# Altium PCB AV.PcbDoc
Units mil, origin at the board's own origin, x right, y up, seen from the top; angles counter-clockwise.
Board outline 1968.5 x 1968.5 mil, 4 copper layers (Top Layer, GND, Power, Bottom Layer), stack 30.634 mil thick; 121 components, 87 nets, 399 pads, 293 vias.
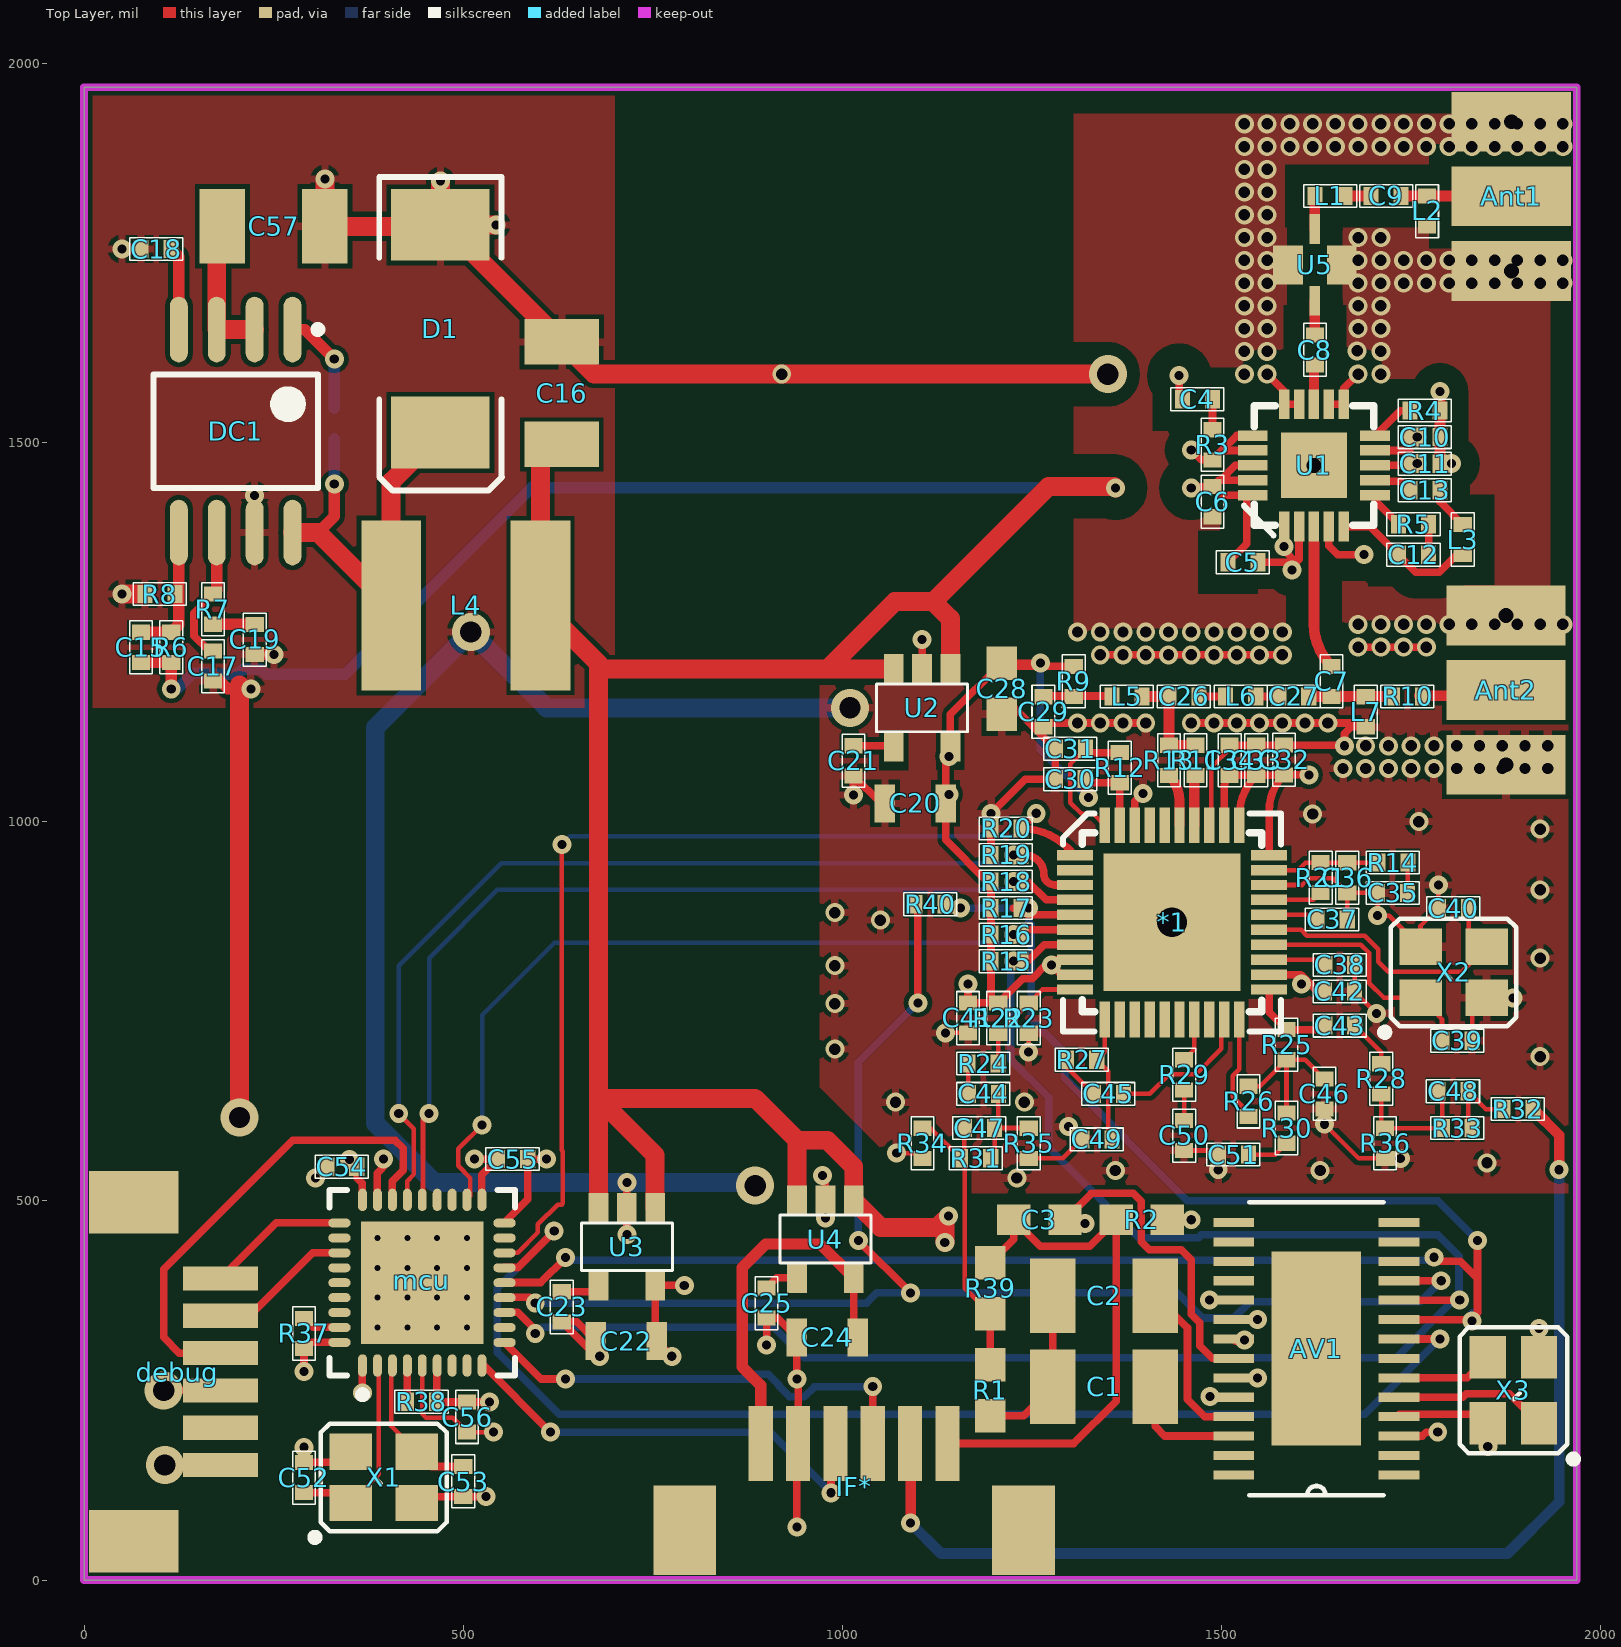
[diagram p0: Top Layer view]
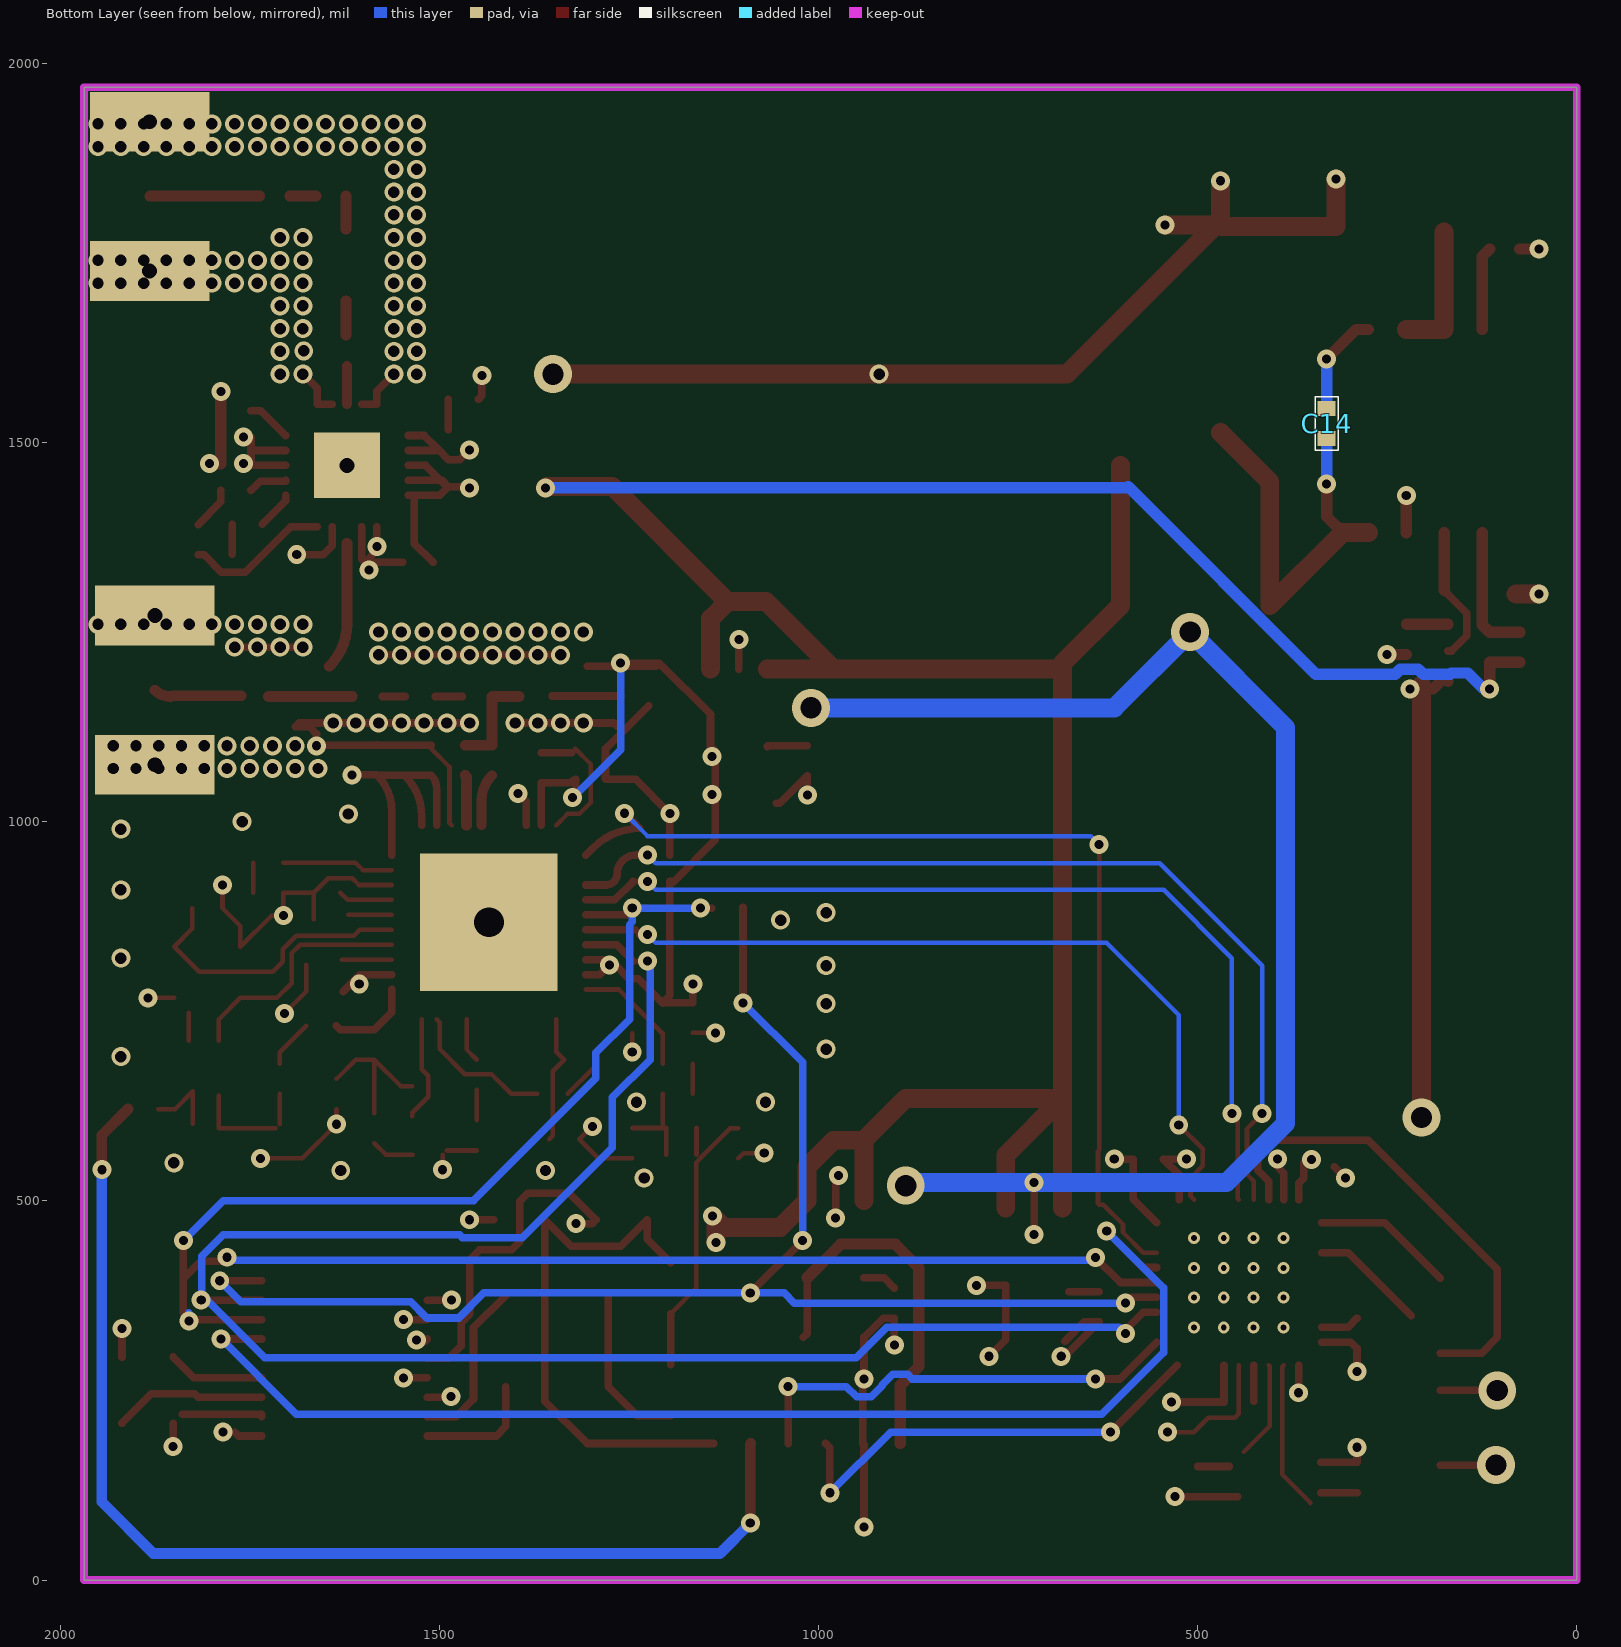
[diagram p1: Bottom Layer view, seen from below]
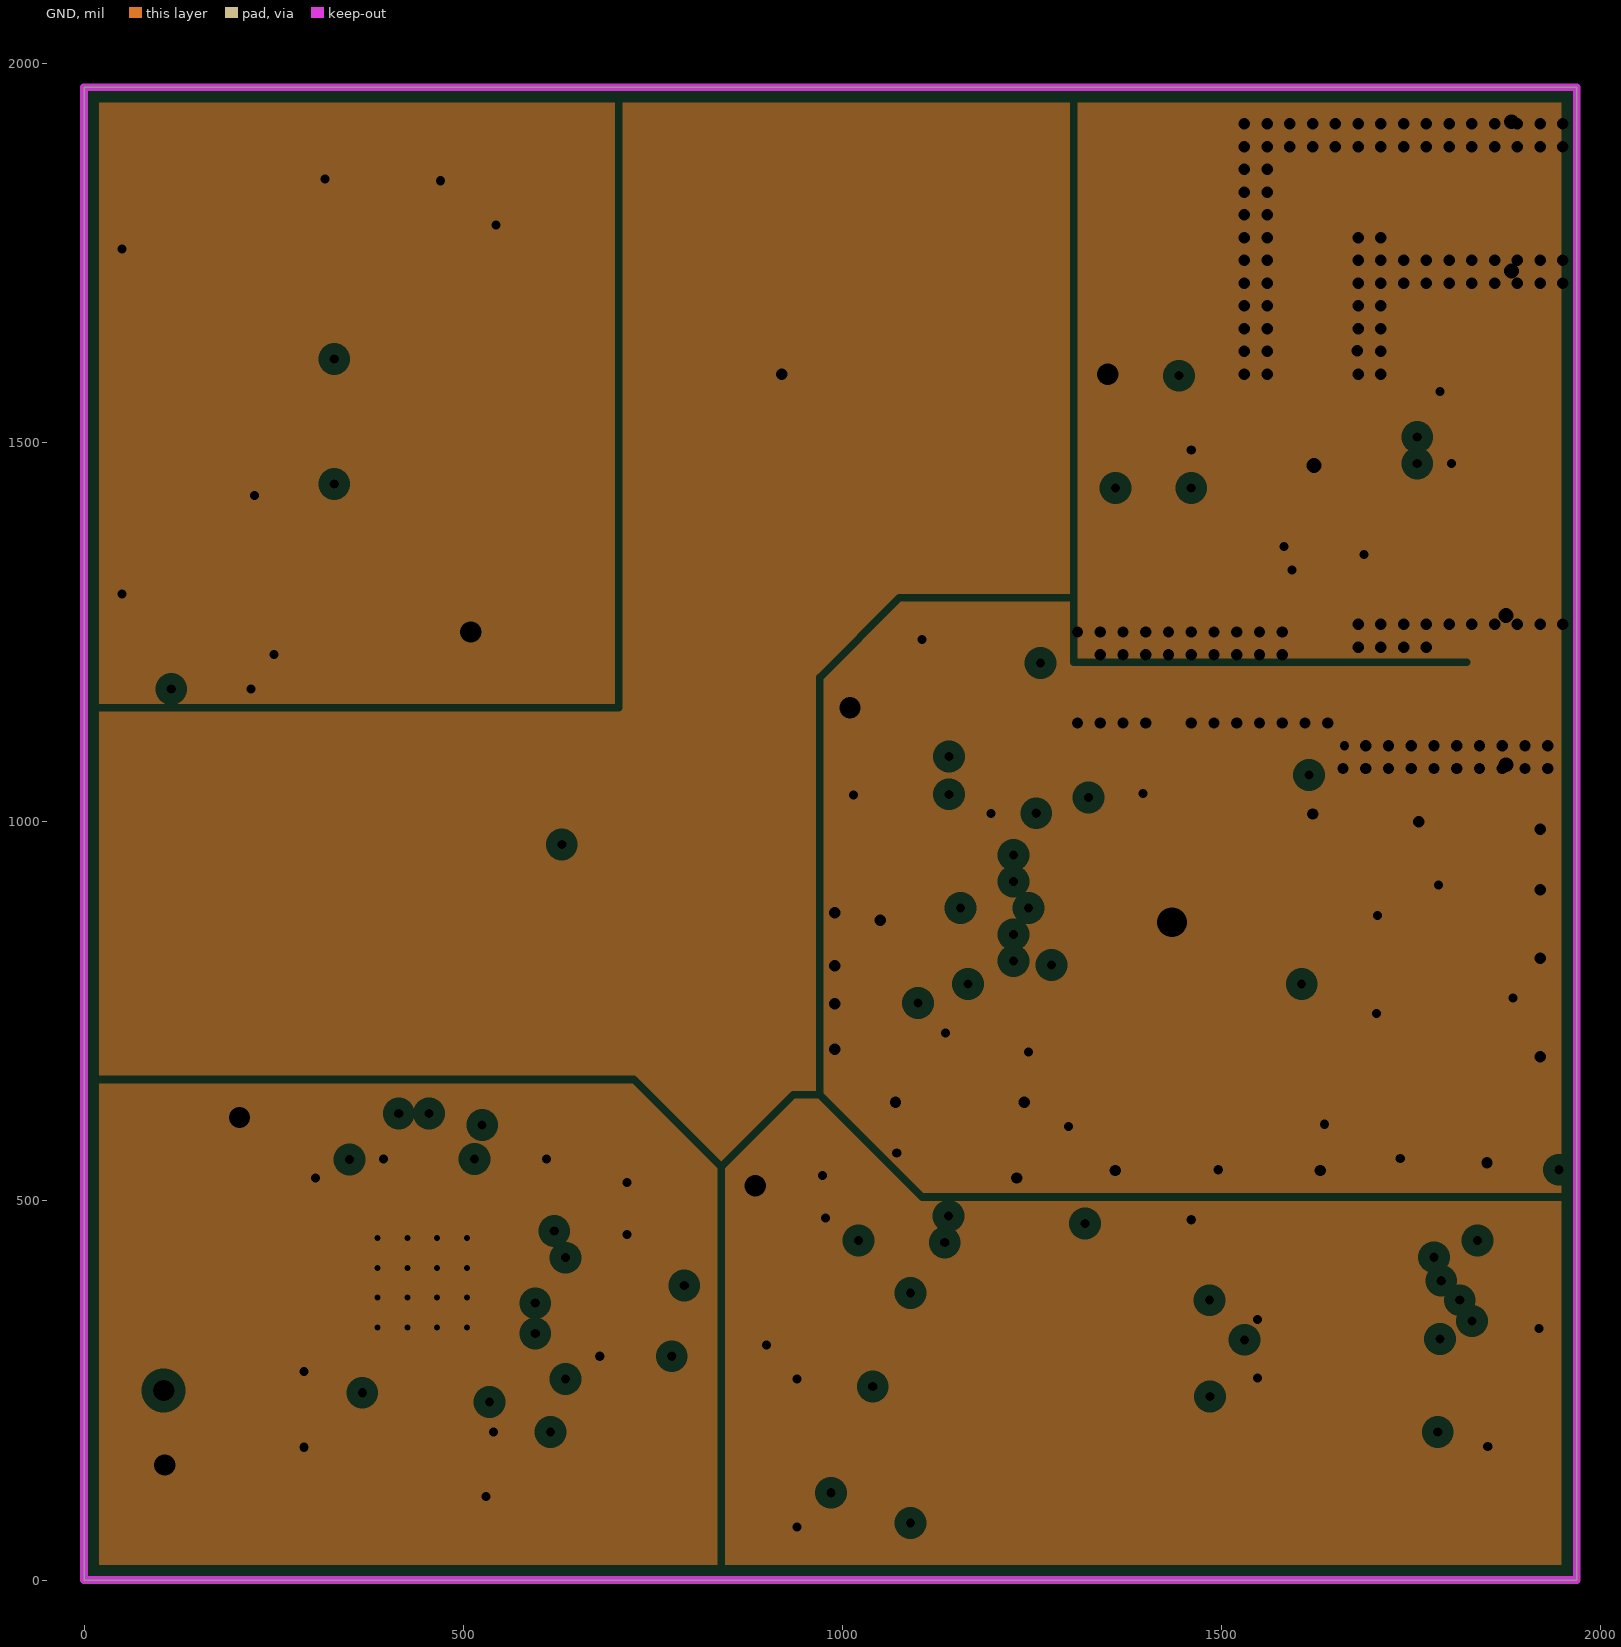
[diagram p2: GND, clearances drawn from the general rule]
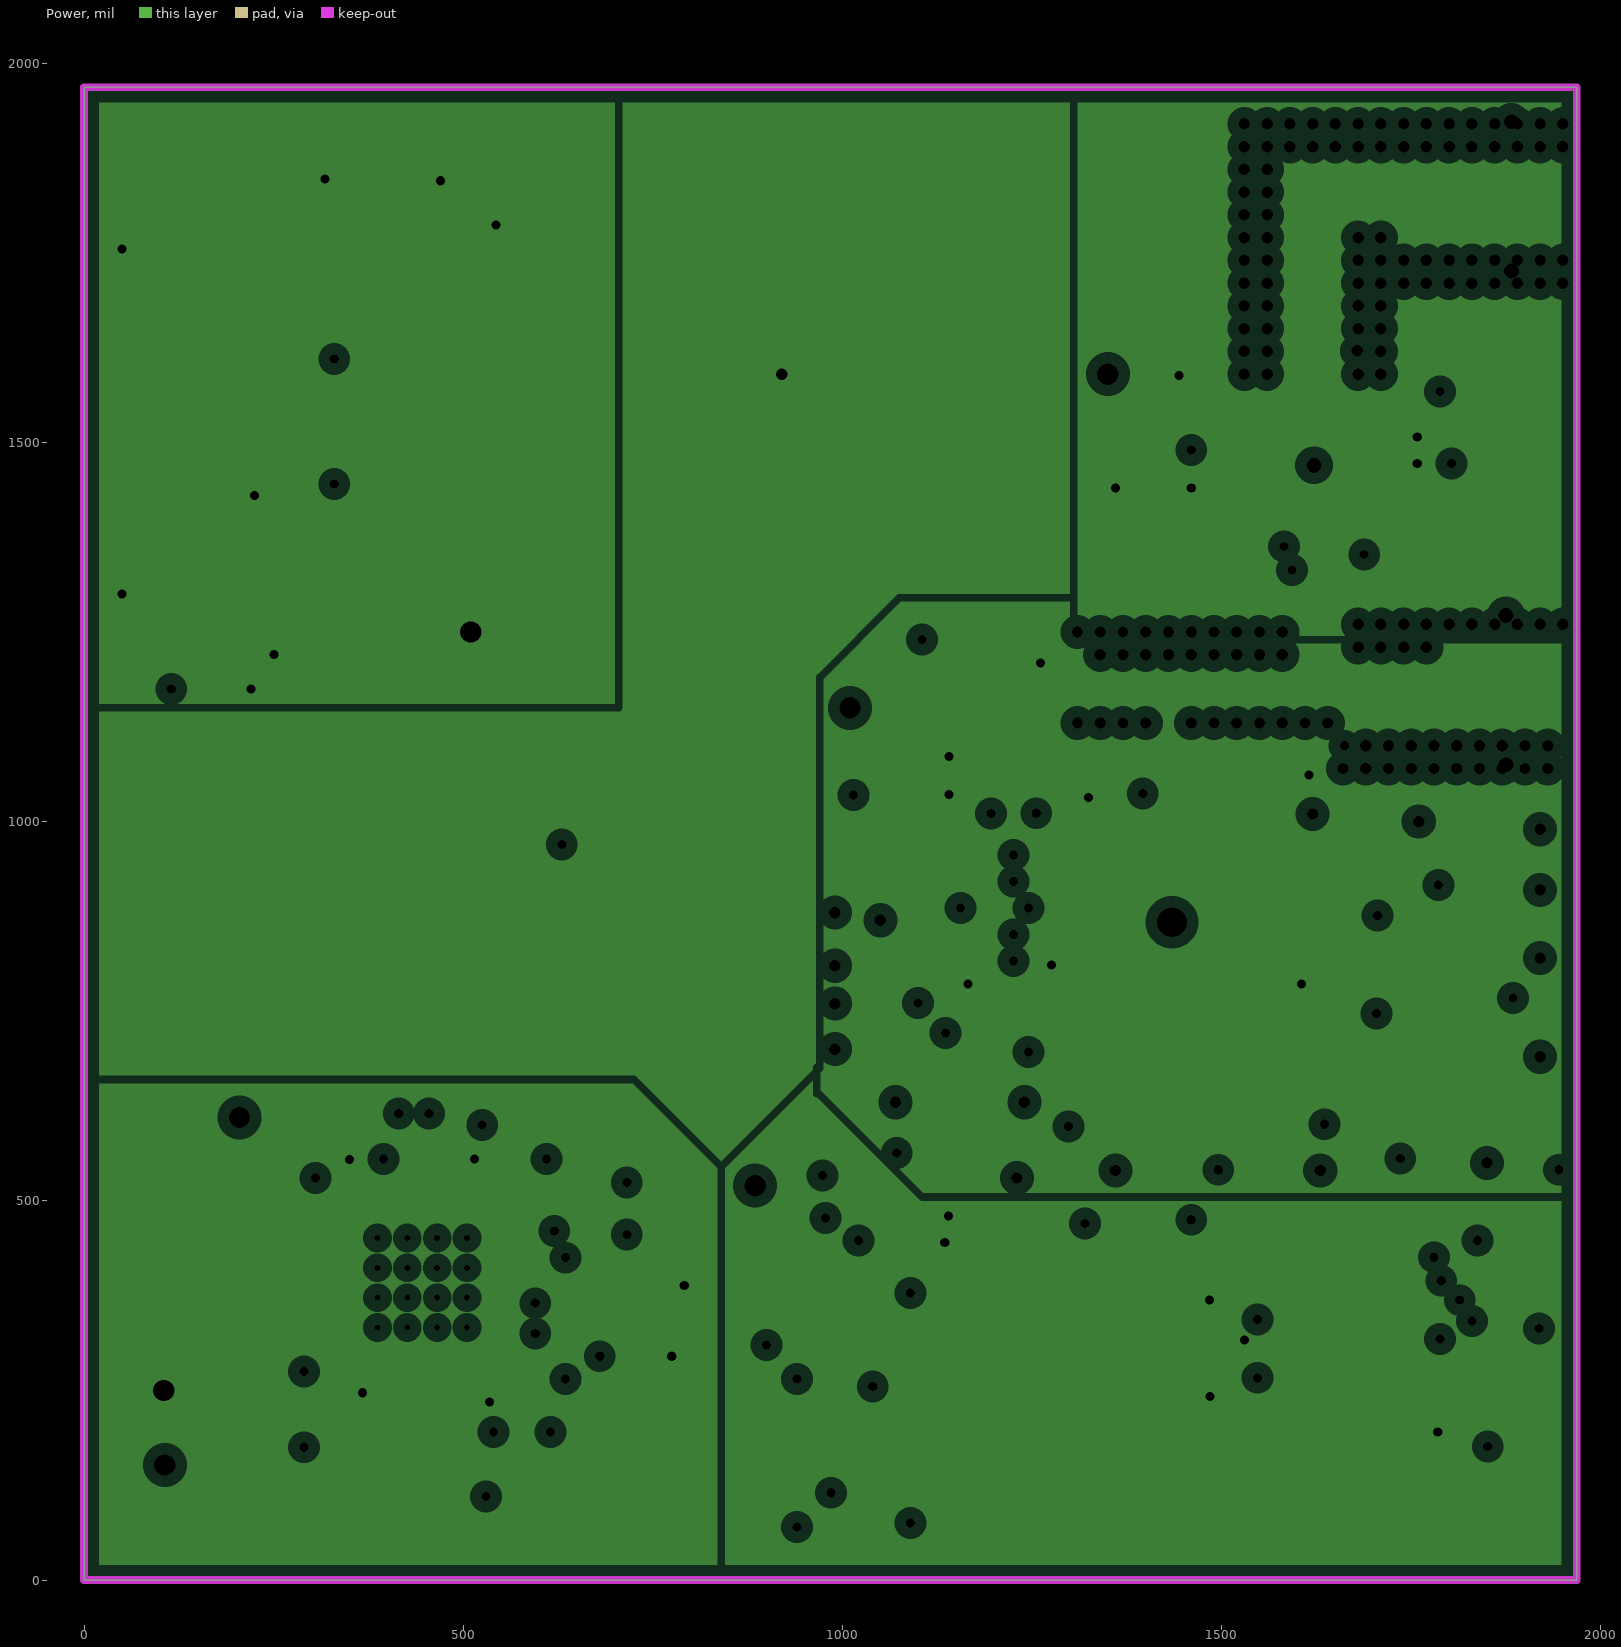
[diagram p3: Power, clearances drawn from the general rule]

## Layer stack, top to bottom
Top Solder: solder mask 0.4, Solder Resist, Dk 3.5
Top Layer: signal copper 1.4
Dielectric 1: core 10, FR-4, Dk 4.2
GND: plane copper 1.417, net GND
Dielectric 3: prepreg 5, Dk 4.2
Power: plane copper 1.417, net (Multiple Nets)
Dielectric 2: core 10, Dk 4.2
Bottom Layer: signal copper 1.4
Bottom Solder: solder mask 0.4, Solder Resist, Dk 3.5

## Board outline
0,0 1968.5,0 1968.5,1968.5 0,1968.5

## Design rules (kind name [scope] priority, off if disabled: settings)
Clearance Clearance_2 [InNamedPolygon('PA')] p1: gap=30
Clearance [All] p2: gap=6
MinimumSolderMaskSliver [All] p1 off: minsoldermaskwidth=10
PlaneClearance [All] p1: clearance=15
PlaneConnect [All] p1: planeconnectstyle=Direct reliefexpansion=10 reliefentries=4 reliefconductorwidth=10 reliefairgap=10
PolygonConnect PolygonConnect_2 [All vs IsNamedPolygon('PA')] p1: connectstyle=Direct reliefconductorwidth=10 reliefentries=4 polygonreliefangle="90 Angle" airgapwidth=10
PolygonConnect [All] p2: connectstyle=Relief reliefconductorwidth=10 reliefentries=4 polygonreliefangle="90 Angle" airgapwidth=6
RoomDefinition RTC6705 [InComponentClass('RTC6705')] p1 off: confinementstyle=ConfineIn formatcopy=TRUE lockcomponents=FALSE outline 2002.56,2269.49 15506.51,2269.49 15506.51,2741.93 2002.56,2741.93
RoomDefinition power [InComponentClass('power')] p2 off: confinementstyle=ConfineIn formatcopy=TRUE lockcomponents=FALSE outline 2002.56,1639.57 5900.2,1639.57 5900.2,2230.12 2002.56,2230.12
RoomDefinition PA [InComponentClass('PA')] p3 off: confinementstyle=ConfineIn formatcopy=TRUE lockcomponents=FALSE outline 2002.56,1127.76 5427.76,1127.76 5427.76,1600.2 2002.56,1600.2
RoomDefinition OSD [InComponentClass('OSD')] p4 off: confinementstyle=ConfineIn formatcopy=TRUE lockcomponents=FALSE outline 2002.56,537.21 3695.48,537.21 3695.48,1088.39 2002.56,1088.39
RoomDefinition MCU [InComponentClass('MCU')] p5 off: confinementstyle=ConfineIn formatcopy=TRUE lockcomponents=FALSE outline 2002.56,64.76 2514.37,64.76 2514.37,497.84 2002.56,497.84
RoutingVias [All] p1: holewidth=12 width=25 viastyle="Through Hole" minholewidth=12 minwidth=25 maxholewidth=28 maxwidth=50
SilkToBoardRegionClearance [All] p1 off:
SilkToSilkClearance [All] p1 off: silktosilkclearance=10
SilkToSolderMaskClearance [IsPad] p1 off: minsilkscreentomaskgap=10 clearancetoexposedcopper=TRUE
SolderMaskExpansion [All] p1: expansion=4
UnpouredPolygon [All] p1: allowunpoured=FALSE
Width [All] p1: maxlimit=25 minlimit=6 preferedwidth=6
23 further rules are at their usual default settings.

## Classes and differential pairs
component class RTC6705: *1 Ant2 C26 C27 C28 C29 C30 C31 C32 C33 C34 C35 C36 C37 C38 C39 C40 C41 C42 C43 C44 C45 C46 C47 C48 C49 C50 C51 L5 L6 L7 R9 R10 R11 R12 R13 R14 R15 R16 R17 R18 R19 R20 R21 R22 R23 R24 R25 R26 R27 R28 R29 R30 R31 R32 R33 R34 R35 R36 R40 X2
component class power: C14 C15 C16 C17 C18 C19 C20 C21 C22 C23 C24 C25 C57 D1 DC1 L4 R6 R7 R8 U2 U3 U4
component class PA: Ant1 C4 C5 C6 C7 C8 C9 C10 C11 C12 C13 L1 L2 L3 R3 R4 R5 U1 U5
component class OSD: AV1 C1 C2 C3 IF* R1 R2 R39 X3
component class MCU: C52 C53 C54 C55 C56 debug mcu R37 R38 X1

## Components (designator, comment, footprint, x,y, rotation, side; value= is the part's Value field where it differs from the comment)
*1 "RTC6705" RTC6705 1434.61,867.22 r0 top
Ant1 "Antenna" SMA 1882,1726 r90 top
Ant2 "Antenna" SMA 1875,1075 r90 top
AV1 "MAX7456" 28TSSOP 1625,305 r180 top
C1 "" 1210 1345,255 r180 top
C2 "" 1210 1345,375 r180 top
C3 "" 0603 1260,475 r180 top
C4 "Cap" 0402 1468,1557 r0 top
C5 "Cap" 0402 1528,1342 r0 top
C6 "Cap" 0402 1488,1422 r270 top
C7 "Cap" 0402 1645,1185 r270 top
C8 "Cap" 0402 1623,1622 r270 top
C9 "Cap" 0402 1717,1825 r180 top
C10 "Cap" 0402 1768,1507 r0 top
C11 "Cap" 0402 1768,1472 r0 top
C12 "Cap" 0402 1753,1352 r180 top
C13 "Cap" 0402 1768,1437 r0 top
C14 "Cap" 0402 330,1525 r270 bottom
C15 "Cap" 0402 75,1230 r270 top
C16 "Cap" 1210 630,1565 r90 top
C17 "Cap" 0402 170,1205 r90 top
C18 "Cap" 0402 95,1755 r0 top
C19 "Cap" 0402 225,1240 r90 top
C20 "Cap" 0805 1096,1024 r180 top
C21 "Cap" 0402 1014.6,1080 r90 top
C22 "Cap" 0805 715,315 r180 top
C23 "Cap" 0402 630,360 r90 top
C24 "Cap" 0805 980,320 r180 top
C25 "Cap" 0402 900,365 r90 top
C26 "Cap" 0402 1450,1165 r0 top
C27 "Cap" 0402 1595,1165 r0 top
C28 "Cap" 0603 1210,1175 r90 top
C29 "Cap" 0402 1265,1145 r270 top
C30 "Cap" 0402 1300.6,1056 r180 top
C31 "Cap" 0402 1300.6,1096 r0 top
C32 "Cap" 0402 1582.36,1081.55 r270 top
C33 "Cap" 0402 1545.6,1081 r270 top
C34 "Cap" 0402 1510.6,1081 r270 top
C35 "Cap" 0402 1725.6,906 r180 top
C36 "Cap" 0402 1665.6,926 r270 top
C37 "Cap" 0402 1645.6,871 r0 top
C38 "Cap" 0402 1655.6,811 r0 top
C39 "Cap" 0402 1810.6,711 r180 top
C40 "Cap" 0402 1805.6,886 r0 top
C41 "Cap" 0402 1165.6,741 r90 top
C42 "Cap" 0402 1655.6,776 r180 top
C43 "Cap" 0402 1655.6,731 r0 top
C44 "Cap" 0402 1185.6,641 r0 top
C45 "Cap" 0402 1350.6,641 r0 top
C46 "Cap" 0402 1635.6,641 r270 top
C47 "Cap" 0402 1180.6,596 r0 top
C48 "Cap" 0402 1805.05,644.38 r0 top
C49 "Cap" 0402 1335.6,581 r180 top
C50 "Cap" 0402 1450.6,586 r90 top
C51 "Cap" 0402 1515.6,561 r180 top
C52 "Cap" 0402 290,135 r90 top
C53 "Cap" 0402 500,130 r270 top
C54 "Cap" 0402 340,545 r180 top
C55 "Cap" 0402 565,555 r0 top
C56 "Cap" 0402 505,215 r270 top
C57 "Cap" 1210 250,1785 r0 top
D1 "Diode" SMC 470,1650 r270 top
DC1 "TPS54233" SO8 200,1515 r270 top
debug "debug" WFRSM125 180,250 r270 top
IF* "camera_if" WFRSM125 1040,180 r0 top
L1 "Inductor" 0402 1643,1825 r180 top
L2 "Inductor" 0402 1771,1805 r90 top
L3 "Inductor" 0402 1818,1372 r270 top
L4 "Inductor" L6028/L6045 405,1285 r0 top
L5 "Inductor" 0402 1375,1165 r0 top
L6 "Inductor" 0402 1525,1165 r0 top
L7 "Inductor" 0402 1690,1145 r270 top
mcu "STM32F103T8U6" VFQN36_V 446,392 r90 top
R1 "" 0603 1195,250 r90 top
R2 "" 0603 1395,475 r180 top
R3 "Res2" 0402 1488,1497 r270 top
R4 "Res2" 0402 1768,1542 r0 top
R5 "Res2" 0402 1753,1392 r0 top
R6 "Res2" 0402 115,1230 r270 top
R7 "Res2" 0402 170,1280 r90 top
R8 "Res2" 0402 100,1300 r0 top
R9 "Res2" 0402 1305,1185 r270 top
R10 "Res2" 0402 1745,1165 r0 top
R11 "Res2" 0402 1465.6,1081 r270 top
R12 "Res2" 0402 1365.6,1071 r90 top
R13 "Res2" 0402 1430.6,1081 r270 top
R14 "Res2" 0402 1725.6,946 r0 top
R15 "Res2" 0402 1215.6,816 r0 top
R16 "Res2" 0402 1215.6,851 r0 top
R17 "Res2" 0402 1215.6,886 r0 top
R18 "Res2" 0402 1215.6,921 r0 top
R19 "Res2" 0402 1215.6,956 r0 top
R20 "Res2" 0402 1215.6,991 r0 top
R21 "Res2" 0402 1630.6,926 r90 top
R22 "Res2" 0402 1205.6,741 r270 top
R23 "Res2" 0402 1245.6,741 r270 top
R24 "Res2" 0402 1185.6,681 r180 top
R25 "Res2" 0402 1585.6,706 r270 top
R26 "Res2" 0402 1535.6,631 r90 top
R27 "Res2" 0402 1315.6,686 r180 top
R28 "Res2" 0402 1710.6,661 r270 top
R29 "Res2" 0402 1450.6,666 r90 top
R30 "Res2" 0402 1585.6,596 r270 top
R31 "Res2" 0402 1175.6,556 r0 top
R32 "Res2" 0402 1890.6,621 r0 top
R33 "Res2" 0402 1810.6,596 r0 top
R34 "Res2" 0402 1105.6,576 r270 top
R35 "Res2" 0402 1245.6,576 r270 top
R36 "Res2" 0402 1715.6,576 r270 top
R37 "Res2" 0402 290,325 r90 top
R38 "Res2" 0402 445,235 r180 top
R39 "" 0603 1195,385 r270 top
R40 "Res2" 0402 1115.6,891 r0 top
U1 "SE5004L" SE5004L 1621.78,1469.72 r90 top
U2 "LP5907" SOT23-5 1105,1150 r180 top
U3 "LP5907" SOT23-5 715.71,439.49 r180 top
U4 "LP5907" SOT23-5 977.56,449.49 r180 top
U5 "BF2012" BF2012 1623,1734 r90 top
X1 "24.000 KHz 3.2x2.5mm 8-10pf" OSCILLATOR-3.2X2.5 395,135 r0 top
X2 "8mhz" OSCILLATOR-3.2X2.5 1805.6,801 r0 top
X3 "8mhz" OSCILLATOR-3.2X2.5 1885,250 r90 top

## Footprints (in the part's own frame and the unit in brackets; to place one, negate y for a bottom-side part, rotate by r counter-clockwise, add the part's x,y. Pads: shape width x height; smd on the part's side, far side on the other; paste and mask are expansions set on the pad)
28TSSOP [mil]
  rect 118.11x255.91 smd: 0(0,0)
  rect 54x12 smd: 1(-109,166.34) 2(-109,140.75) 3(-109,115.16) 4(-109,89.57) 5(-109,63.98) 6(-109,38.39) 7(-109,12.8) 8(-109,-12.8) 9(-109,-38.39) 10(-109,-63.98) 11(-109,-89.57) 12(-109,-115.16) 13(-109,-140.75) 14(-109,-166.34) 15(109,-166.34) 16(109,-140.75) 17(109,-115.16) 18(109,-89.57) 19(109,-63.98) 20(109,-38.39) 21(109,-12.8) 22(109,12.8) 23(109,38.39) 24(109,63.98) 25(109,89.57) 26(109,115.16) 27(109,140.75) 28(109,166.34)
  silkscreen extent -89,-193 89,193
0402 [mil] "0402-CAP"
  rect 20x24 smd: 1(20,0) 2(-19.69,0)
  silkscreen extent -35,-15 35,15
0603 [mil] "0603"
  rect 44x40 smd: 1(-33.46,0) 2(34,0)
0805 [mil]
  rect 27x50 smd: 1(-40,0) 2(40,0)
  body extent -50,-30 50,30, height 31
1210 [mm]
  rect 1.52x2.5 smd: 1(-1.715,0) 2(1.715,0)
BF2012 [mm]
  rect 1.3x1 smd: 0(0,0.9) 0(0,-0.9)
  rect 1x0.35 smd: 1(-1.2,0) 2(1.2,0)
L6028/L6045 [mm]
  rect 2x5.7 smd: 1(0,0) 2(5,0)
OSCILLATOR-3.2X2.5 [mil] "OSCILLATOR-3.2X2.5"
  rect 56x48 smd: 1(-43.31,-33.46) 2(44,-33.46) 3(44,34) 4(-43.31,34)
  silkscreen extent -95,-83 83,71
RTC6705 [mm]
  rect 4.6x4.6 hole 1: 0(0,0)
  rect 1.2x0.35 smd: 1(-3.25,2.25) 2(-3.25,1.75) 3(-3.25,1.25) 4(-3.25,0.75) 5(-3.25,0.25) 6(-3.25,-0.25) 7(-3.25,-0.75) 8(-3.25,-1.25) 9(-3.25,-1.75) 10(-3.25,-2.25) 21(3.25,-2.25) 22(3.25,-1.75) 23(3.25,-1.25) 24(3.25,-0.75) 25(3.25,-0.25) 26(3.25,0.25) 27(3.25,0.75) 28(3.25,1.25) 29(3.25,1.75) 30(3.25,2.25)
  rect 0.35x1.2 smd: 11(-2.25,-3.25) 12(-1.75,-3.25) 13(-1.25,-3.25) 14(-0.75,-3.25) 15(-0.25,-3.25) 16(0.25,-3.25) 17(0.75,-3.25) 18(1.25,-3.25) 19(1.75,-3.25) 20(2.25,-3.25) 31(2.25,3.25) 32(1.75,3.25) 33(1.25,3.25) 34(0.75,3.25) 35(0.25,3.25) 36(-0.25,3.25) 37(-0.75,3.25) 38(-1.25,3.25) 39(-1.75,3.25) 40(-2.25,3.25)
  silkscreen extent -3.65,-3.65 3.65,3.65, body extent -3,-3 3,3, height 0.85
SE5004L [mm]
  rect 2.2x2.2 hole 0.5: 0(0,0)
  rect 1x0.35 smd: 1(-2.05,1) 2(-2.05,0.5) 3(-2.05,0) 4(-2.05,-0.5) 5(-2.05,-1) 11(2.05,-1) 12(2.05,-0.5) 13(2.05,0) 14(2.05,0.5) 15(2.05,1)
  rect 0.35x1 smd: 6(-1,-2.05) 7(-0.5,-2.05) 8(0,-2.05) 9(0.5,-2.05) 10(1,-2.05) 16(1,2.05) 17(0.5,2.05) 18(0,2.05) 19(-0.5,2.05) 20(-1,2.05)
  silkscreen extent -2.35,-2 2,2.35, body extent -2,-2 2,2, height 0.85
SMA [mm]
  rect 2x4 smd: 1(2.5,0)
  rect 2x4 hole 0.5: GND(0,0) GND(5,0)
SMC [mm] "DO-214-AB/SMC; 2 C-Bend Leads; Body 7.9 x 5.9 mm, inc. leads (LxW)"
  rect 2.4x3.3 smd: 1(-3.475,0) 2(3.475,0)
  silkscreen extent -5.08,-2.05 5.42,2.06
SO8 [mm] "8-Pin Small Outline Package 1.27 mm Pitch, IPC Medium Density"
  oval 2.2x0.6 smd: 1(-3.4,1.905) 2(-3.4,0.635) 3(-3.4,-0.635) 4(-3.4,-1.905) 5(3.4,-1.905) 6(3.4,-0.635) 7(3.4,0.635) 8(3.4,1.905)
  silkscreen extent -3.52,-2.75 1.9,2.88, body extent -2.73,-2.75 2.73,2.75, height 2.03
SOT23-5 [mil]
  rect 26x40 smd: 1(-37.4,-51) 2(0,-51) 3(37.4,-51) 4(37.4,51) 5(-37.4,51)
  silkscreen extent -60,-32 60,32
VFQN36_V [mm]
  rect 4.1x4.1 smd: 0(0,0)
  oval 0.75x0.3 smd: 1(-2.775,2) 2(-2.775,1.5) 3(-2.775,1) 4(-2.775,0.5) 5(-2.775,0) 6(-2.775,-0.5) 7(-2.775,-1) 8(-2.775,-1.5) 9(-2.775,-2) 19(2.775,-2) 20(2.775,-1.5) 21(2.775,-1) 22(2.775,-0.5) 23(2.775,0) 24(2.775,0.5) 25(2.775,1) 26(2.775,1.5) 27(2.775,2)
  oval 0.3x0.75 smd: 10(-2,-2.755) 11(-1.5,-2.755) 12(-1,-2.755) 13(-0.5,-2.755) 14(0,-2.755) 15(0.5,-2.755) 16(1,-2.755) 17(1.5,-2.755) 18(2,-2.755) 28(2,2.775) 29(1.5,2.775) 30(1,2.775) 31(0.5,2.775) 32(0,2.775) 33(-0.5,2.775) 34(-1,2.775) 35(-1.5,2.775) 36(-2,2.775)
  silkscreen extent -3.87,-3.1 3.1,3.1
WFRSM125 [mm]
  rect 0.81x2.5 smd: 1(-3.75,0) 2(-2.5,0) 3(-1.25,0) 4(0,0) 5(1.25,0) 6(2.5,0)
  rect 2.1x3 smd: shell(-6.3,-2.9) shell(5.05,-2.9)
  body extent -6.79,-3.82 5.46,0.38, height 3.4

## Part data
C1 C2 C3: library part "Cap Semi", "Capacitor (Semiconductor SIM Model)"
C4 C5 C6 C7 C8 C9 C10 C11 C12 C13 C14 C15 C16 C17 C18 C19 C20 C21 C22 C23 C24 C25 C26 C27 C28 C29 C30 C31 C32 C33 C34 C35 C36 C37 C38 C39 C40 C41 C42 C43 C44 C45 C46 C47 C48 C49 C50 C51 C52 C53 C54 C55 C56 C57: "Capacitor"
D1: "Default Diode"
mcu: "STM32 ARM-based 32-bit MCU with 64 Kbytes Flash, 36-pin VFQFPN, Industrial Temperature"
R1 R2 R39: library part Res2, "Resistor"
R3 R4 R5 R6 R7 R8 R9 R10 R11 R12 R13 R14 R15 R16 R17 R18 R19 R20 R21 R22 R23 R24 R25 R26 R27 R28 R29 R30 R31 R32 R33 R34 R35 R36 R37 R38 R40: "Resistor"
X1 X2 X3: library part OSCILLATOR-3.2X2.5, "Crystal Oscillator in 3.2x2.5 SMD"

## Via types
v1: diameter 25, hole 15, Top Layer to Bottom Layer, 161 vias
v2: diameter 25, hole 12, Top Layer to Bottom Layer, 109 vias
v3: diameter 15.75, hole 7.87, Top Layer to Bottom Layer, 16 vias
v4: diameter 50, hole 28, Top Layer to Bottom Layer, 7 vias

## Nets (pads, with @x,y where several pads share a name; then routed paths per layer and width w, separated by ;. In a path a pad name is that pad's centre, name@x,y a point inside that pad or via, vN(x,y) a via of type N, cw(c..) or ccw(c..) an arc to the next point about the centre after c; other vN are vias at no path point)
3.3A: *1.8 *1.9 *1.22 *1.30 *1.31 *1.32 *1.39 C20.1 C28.2 C30.2 C32.1 C33.1 C34.1 C41.1 C42.1 R9.2 R12.2 R15.2 R16.2 R17.2 R18.2 R22.2 U2.5 | length 1660.1
  Top Layer w10: v2(1165.6,786) C41.1 R22.2@1205.28,761 ; v2(1261,1209) C28.2 ; R9.2 1214.31,1204.69 C28.2 ; *1.9 1288.27,798.32 v2(1275.6,811) ; *1.8 1275.6,818.01 v2(1275.6,811) ; v2(1324.33,1031.63) 1320.28,1035.68 C30.2 ccw(c1331.88,1067.59) 1331.88,1051.2 1365.72,1051.2 *1.39 ; *1.32 1503.51,1043.89 cw(c1527.71,1043.89) C34.1 C33.1 ; *1.31 1523.2,1006.92 cw(c1599.68,1006.92) C33.1 ; *1.22 1604.59,798.32 v2@1605.6,797.31 ; *1.30 1562.57,1013.76 cw(c1630.15,1013.76) C32.1@1581.82,1061 ; v2(1605.6,786) v2@1605.6,797.31 ; v2(1615.05,1061.55) C32.1 ccw(c1630.15,1013.76) C32.1@1581.82,1061 ; C42.1@1626.91,776 v2@1605.6,797.31 ; R22.2@1205.28,761 R22.2 1237.91,793 1250.15,793 1268.15,811 v2(1275.6,811) ; R22.2@1205.28,761 1195.91,770.37 R15.2 R16.2 R17.2 R18.2 1191,921 1136,976 C20.1 1136,1092.6 U2.5 1142.4,1141.4 C28.2 ; C33.1 C32.1@1581.82,1061
  Bottom Layer w10: v2(1261,1209) 1261,1094.97 v2(1324.33,1031.63)
  other v2: 1140.6,1036 1140.6,1086
3.3CAMERA: C24.1 IF*.1 U4.5 | length 500.9
  Top Layer w10: U4.5 1014.96,325.04 C24.1
  Top Layer w15: IF*.1 892.36,256.64 868,281 868,412 899,443 970.45,443 U4.5
3.3D: C22.1 C54.2 C55.2 C56.2 debug.4 mcu.1 mcu.6 mcu.19 mcu.27 R38.2 U3.5 | length 524
  Top Layer w10: v4(105,250) debug.4 ; v2(350,554.68) C54.2 ; C54.2@360.32,550 360,549.68 360,530 366.93,523.07 mcu.27@366.93,501.57 ; v2(366.93,246.93) mcu.1@366.93,283.07 ; R38.2@465,234.69 C56.2 v2(534.69,234.69) ; R38.2@465.35,235.67 mcu.6@465.35,283.07 ; v2(515,555) C55.2 524.41,534.09 mcu.19@524.41,501.57 ; C22.1@753.11,316.89 U3.5 v2(791.51,388.49) ; C22.1 v2(775,295)
5V: AV1.3 AV1.19 AV1.21 AV1.24 C4.2 C5.2 C6.2 C10.2 C11.2 C15.1 C16.1 L4.2 R6.1 U1.8 U1.9 U1.18 U1.19 U1.20 U2.1 U2.3 U3.1 U3.3 U4.1 U4.3 | length 4874.3
  Top Layer w10: v2(1444,1588) 1444,1561.31 C4.2 ; v2(1460,1440) 1461.69,1441.69 C6.2 ; v2(1483.98,368.98) AV1.19 ; v2(1484.56,242.11) 1484,241.55 1484,241.02 AV1.24 ; C6.2@1490.24,1441.69 C6.2@1498.59,1450.03 ; C5.2 1533,1366.68 U1.20@1533,1430.35 ; AV1.21 1518.8,315 1520.5,316.7 v2(1530.29,316.7) ; U1.20 U1.20@1533,1430.35 ; U1.19 C6.2@1498.59,1450.03 ; U1.18 1518.27,1469.72 C6.2@1498.59,1450.03 ; U1.8 C11.2@1746.03,1469.72 ; U1.9 1748.22,1489.4 ; AV1.3 1764.84,189.84 1764.68,190 1769.68,195 v2(1785,195) ; v2(1758,1472) C11.2 C10.2 v2(1758,1507) ; C6.2 1499.34,1430.35 U1.20@1533,1430.35 ; C6.2 1496.35,1450.03 C6.2@1498.59,1450.03
  Top Layer w15: C15.1 R6.1 v2(115,1175)
  Top Layer w25: C16.1@601.85,1469.33 L4.2 678.31,1208.54 678.31,635 ; U3.3 678.31,635 ; 685.85,1201 980,1201 ; U3.1 753.11,560.2 678.31,635 ; U4.3 940.16,579.84 ; U2.3 980,1201 ; v2(1135,445) 1135,475 1125,465 1050.45,465 U4.1 1014.96,545.04 980.16,579.84 940.16,579.84 ; U2.1 1142.4,1267.6 1120,1290 ; v2(1360,1440) 1358,1442 1272,1442 1120,1290 ; 678.31,635 885,635 940.16,579.84 ; 980,1201 1069,1290 1120,1290
  Bottom Layer w10: v2@1477.11,242.11 v2(1484.56,242.11)
  Bottom Layer w15: v2(115,1175) 122.91,1175 143.91,1196 165.45,1196 167.14,1194.32 202.55,1194.32 209.23,1201 232.86,1201 239.55,1194.32 344.32,1194.32 591.69,1441.69 593.37,1440 v2(1360,1440)
  other v2: 1140,480
GND: *1.0 *1.28 *1.33 *1.38 Ant1.GND Ant2.GND AV1.4 AV1.20 AV1.23 C5.1 C6.1 C10.1 C11.1 C16.2 C17.2 C18.2 C19.2 C20.2 C21.2 C22.2 C23.2 C24.2 C25.2 C28.1 C29.1 C30.1 C31.2 C32.2 C33.2 C34.2 C35.1 C36.1 C37.1 C38.1 C39.2 C40.2 C41.2 C42.2 C46.1 C49.1 C50.2 C51.1 C52.1 C53.1 C54.1 C55.1 C56.1 C57.2 D1.1 DC1.7 debug.6 IF*.2 L2.2 L7.1 mcu.0 mcu.5 mcu.18 mcu.26 mcu.36 R2.1 R3.1 R4.1 R8.2 R19.2 R20.2 R23.1 R34.1 R35.1 R36.1 R37.2 U1.0 U1.1 U1.2 U1.4 U1.11 U1.12 U1.14 U1.15 U1.16 U1.17 U2.2 U3.2 U4.2 U5.0 X1.2 X1.4 X2.2 X2.4 X3.2 X3.4 | length 8390.3
  Top Layer w6: mcu.5@445.68,283.06 445.68,219.27 450.96,214 486,214 C56.1 v2(540,195) ; v2(1071.6,563) 1098.6,563 R34.1 ; v2(1135.91,721.32) C41.2 ; R35.1 1290.6,556 C49.1 1298.6,598 v2(1298,598) ; v2(1245.6,696) R23.1 ; C50.2 C51.1@1490.28,566.32 ; *1.33 1486.6,997.95 1486.6,1072 1510.6,1096 C34.2 ; v2(1495.6,541) C51.1 ; *1.28 1605.99,916.43 1614.87,925.32 1646.33,925.32 C36.1 ; C46.1 v2(1635.6,601) 1680.6,556 R36.1 v2(1735.6,556) ; C37.1 C36.1 C35.1 v2(1705.6,876) 1721.29,876 X2.4 1762.29,862.38 C40.2 v2(1785.91,916.31) ; C42.2 1704.1,747.18 v2(1704.1,747.09) ; C42.2@1675.6,776.32 C38.1 ; C39.2 X2.2@1830.28,748.22 ; X2.2 v2(1884.06,767.54)
  Top Layer w10: v4(106.57,151.57) debug.6 ; v2(290,175) C52.1 X1.4@337.69,155 ; v2(290,275) R37.2 298.27,313.58 mcu.36@336.42,313.58 ; v2(305,530) C54.1 ; mcu.26@386.61,501.57 386.61,536.61 400,550 v2(395,555) ; X1.2@447.46,110 C53.1 v2(530,110) ; mcu.18@554.13,471.06 585,501.93 C55.1 v2(610,555) ; C22.2 649.69,340.31 C23.2 675.31,295 v2(680,295) ; v2(715.71,455.71) U3.2 v2(715.71,524.29) ; v2(900,310) C25.2 914.68,345.32 C24.2 v2(940,265) ; v2(940,70) 940,178.43 IF*.2 v2@941.57,263.43 ; v2(977.56,477.44) U4.2 v2@977.56,532.56 ; v2(1014.6,1035) C21.2 1050.91,1024 C20.2 ; U2.2 v2(1105,1240) ; R19.2 R20.2 v2(1195.91,1010.69) 1241.23,1056 C30.1 ; C28.1@1224.06,1152.54 1280.6,1096 C31.2 C30.1@1280.91,1056.31 ; C29.1 1270,1130 v1(1310,1130) v1(1340,1130) v1(1370,1130) v1(1400,1130) ; v1(1340,1220) v1(1370,1220) v1(1400,1220) v1(1430,1220) v1(1460,1220) v1(1490,1220) v1(1520,1220) v1(1550,1220) v1(1580,1220) ; *1.38 1385.4,1026.6 v2(1396.1,1037.3) ; R2.1 v2(1460,475) ; v1(1460,1130) v1(1490,1130) v1(1520,1130) v1(1550,1130) v1(1580,1130) v1(1610,1130) v1(1640,1130) 1685,1130 L7.1 1671,1125 1662,1116 v2(1662,1100) 1661.31,1100.69 C32.2@1581.81,1100.69 ; v2(1460,1490) 1473,1477 R3.1 1500.4,1489.4 ; C34.2 C33.2 C32.2@1581.81,1100.69 ; AV1.23 v2(1547.45,266.61) ; AV1.20 v2(1547.45,343.39) ; U1.17 1500.4,1489.4 ; U1.16 1520.09,1509.09 1500.4,1489.4 ; C5.1 1598,1342 1582.41,1357.59 v2(1582.41,1362.59) U1.1 ; v1(1560,1590) 1582.41,1567.59 U1.15 U1.14 ; C32.2 C32.2@1581.81,1100.69 ; v2(1593,1332) 1593,1337 1602.09,1346.09 U1.2 ; U1.4 1641.46,1363.54 1653,1352 v2(1688,1352) ; U1.12 U1.11 1661.15,1571.15 v1(1680,1590) ; v1(1680,1230) v1(1710,1230) v1(1740,1230) v1(1770,1230) ; AV1.4 1734,218.5 X3.4@1839.19,218.5 ; v2(1851,176) X3.4 ; X3.2 v2(1918.46,331.54)
  Top Layer w15: v2(50,1755) C18.2 ; C17.2 174.68,1190 189.68,1175 v2(220,1175) ; C19.2 v2(250.32,1220.32) ; DC1.7 v2(225,1430) ; v2(1788,1567) R4.1 C10.1 C11.1 v2(1803,1472)
  Top Layer w25: v2(50,1300) R8.2 ; v4(205,610) 205,1180 ; v2(317.52,1847.52) C57.2 D1.1@468.19,1785 ; v2(470,1845) D1.1 D1.1@475.71,1786.81 ; v2(543.19,1786.81) D1.1@475.71,1786.81 ; v4(1350,1590) 672.52,1590 C16.2 D1.1@475.71,1786.81
  Bottom Layer w10: v2@1396.1,1036.5 v2(1396.1,1037.3) ; v2(1547.45,266.61) v2@1553.33,266.61 ; v2(1547.45,343.39) v2@1551.56,343.39
  Bottom Layer w25: v4(885,520) 881,524 462.16,524 384,602.16 384,1124 v4(510,1250) 610,1150 v4(1010,1150)
  other v1: 1230,530 1360,540 1630,540 1850,550 1070,630 1240,630 1920,690 990,700 990,760 990,810 1920,820 1050,870 990,880 1920,910 1920,990 1760,1000 1620,1010 1660,1070 1690,1070 1720,1070 1750,1070 1780,1070 1810,1070 1840,1070 1870,1070 1900,1070 1930,1070 1690,1100 1720,1100 1750,1100 1780,1100 1810,1100 1840,1100 1870,1100 1900,1100 1930,1100 1310,1250 1340,1250 1370,1250 1400,1250 1430,1250 1460,1250 1490,1250 1520,1250 1550,1250 1580,1250 1680,1260 1710,1260 1740,1260 1770,1260 1800,1260 1830,1260 1860,1260 1890,1260 1920,1260 1950,1260 920,1590 1530,1590 1710,1590 1530,1620 1560,1620 1710,1620 1678.8,1620.72 1530,1650 1560,1650 1680,1650 1710,1650 1530,1680 1560,1680 1680,1680 1710,1680 1530,1710 1560,1710 1680,1710 1710,1710 1740,1710 1770,1710 1800,1710 1830,1710 1860,1710 1890,1710 1920,1710 1950,1710 1530,1740 1560,1740 1680,1740 1710,1740 1740,1740 1770,1740 1800,1740 1830,1740 1860,1740 1890,1740 1920,1740 1950,1740 1530,1770 1560,1770 1680,1770 1710,1770 1530,1800 1560,1800 1530,1830 1560,1830 1530,1860 1560,1860 1530,1890 1560,1890 1590,1890 1620,1890 1650,1890 1680,1890 1710,1890 1740,1890 1770,1890 1800,1890 1830,1890 1860,1890 1890,1890 1920,1890 1950,1890 1530,1920 1560,1920 1590,1920 1620,1920 1650,1920 1680,1920 1710,1920 1740,1920 1770,1920 1800,1920 1830,1920 1860,1920 1890,1920 1920,1920 1950,1920
  other v2: 973.56,533.56
  other v3: 386.94,332.95 426.31,332.95 465.68,332.95 505.05,332.95 386.94,372.32 426.31,372.32 465.68,372.32 505.05,372.32 386.94,411.69 426.31,411.69 465.68,411.69 505.05,411.69 386.94,451.06 426.31,451.06 465.68,451.06 505.05,451.06
Net*1_1: *1.1 mcu.16 R20.1 | length 1337.7
  Top Layer w6: mcu.16@554.13,431.69 571.89,431.69 598.5,458.3 598.5,468.91 624.59,495 630,495 631.5,496.5 631.5,565.41 630,566.91 v2(630,970)
  Top Layer w10: v2(1255.6,1011) R20.1 cw(c1235.6,904.41) 1296.83,965.64 *1.1
  Bottom Layer w6: v2(630,970) 641,981 1226,981 ; 1225.6,981 v2(1255.6,1011)
Net*1_3: *1.3 mcu.24 R19.1 | length 1290.2
  Top Layer w6: v2(415,615) 435,595 435,534.76 425.98,525.74 mcu.24@425.98,501.57
  Top Layer w10: v2(1225.6,956) R19.1 ; R19.1@1240.6,956 cw(c1240.6,931) 1265.6,931 ccw(c1280.16,931) 1280.16,916.43 *1.3
  Bottom Layer w6: v2(415,615) 415,810 550,945 1214.6,945 v2(1225.6,956)
Net*1_4: *1.4 mcu.23 R18.1 | length 1216.8
  Top Layer w6: mcu.23@445.67,501.57 447,502.9 447,607 v2(455,615)
  Top Layer w10: v2(1225.6,921) R18.1 ; R18.1@1244.6,921 1268.85,896.75 *1.4
  Bottom Layer w6: v2(455,615) 455,820 545,910 1214.6,910 v2(1225.6,921)
Net*1_5: *1.5 AV1.9 mcu.14 R17.1 R40.1 | length 2576.1
  Top Layer w10: mcu.14@554.13,392.32 602.32,392.32 v2(635,425) ; R40.1@1140.6,886 v2@1150.6,886 ; R17.1@1225.6,886 R17.1 1244.53,877.06 *1.5 ; AV1.9 1828.39,343.39 v2(1830.31,341.47) ; v2(1780,425.57) 1785,420.57 1814.43,420.57 1837.48,397.52 ; 1837.48,352.48 1837.48,397.52 ; v2(1837.48,447.52) 1837.48,397.52
  Bottom Layer w10: v2(635,425) 638.5,421.5 1775.93,421.5 v2(1780,425.57) ; v2(1155.6,886) v2(1245.6,886) 1245.6,867.73 1249.1,864.23 1249.1,739.5 1293.5,695.1 1293.5,661.5 1455,500 1785,500 v2(1837.48,447.52) ; v2(1830.31,341.47) v2@1830.31,352.07
Net*1_6: *1.6 mcu.20 R16.1 | length 1084.3
  Top Layer w6: mcu.20@504.72,501.57 509.5,506.35 509.5,530.09 493.5,546.09 493.5,568.5 v2(525,600)
  Top Layer w10: v2(1225.6,851) R16.1 ; R16.1@1241.98,857.38 *1.6
  Bottom Layer w6: v2(525,600) 525,745 620,840 1214.6,840 v2(1225.6,851)
Net*1_7: *1.7 AV1.10 mcu.12 R15.1 | length 2408.4
  Top Layer w10: mcu.12@554.13,352.95 572.05,352.95 595,330 v2(595,325) ; v2(1225.6,816) R15.1 ; R15.1@1244.6,816 1266.29,837.69 *1.7 ; AV1.10 v2(1813.98,368.98)
  Bottom Layer w10: v2(595,325) 603.5,333.5 909.73,333.5 950.03,293.2 1729.97,293.2 v2@1805.74,368.98 ; v2(1225.6,816) 1222.1,812.5 1222.1,686.27 1272.1,636.27 1272.1,569.9 1390.5,451.5 1469.73,451.5 1473.23,455 1785,455 1813.07,426.93 1813.07,369.89 v2(1813.98,368.98)
Net*1_10: *1.10 R22.1 R23.2 R24.2 | length 164.6
  Top Layer w6: R24.2 R22.1@1205.28,720.69 ; R22.1 1205.91,721 R23.2 1263.55,778.64 *1.10
Net*1_11: *1.11 C49.2 R27.2 | length 171
  Top Layer w6: *1.11 1346.03,696.75 R27.2 1350.6,670.68 1350.6,585.68 C49.2
Net*1_17: *1.17 R29.1 | length 58.9
  Top Layer w6: R29.1 1464.14,699.54 *1.17
Net*1_19: *1.19 C45.1 | length 194.2
  Top Layer w6: C45.1 1405.24,641 1431.24,667 1466.33,667 1499.72,700.39 1499.72,735.47 *1.19
Net*1_20: *1.20 R26.2 | length 140.2
  Top Layer w6: *1.20 1523.2,673.33 1514.6,664.73 1514.6,637.27 1535.6,616.27 R26.2
Net*1_21: *1.21 C43.2 R25.2 | length 115
  Top Layer w10: *1.21 1562.57,748.72 R25.2 1630.6,725.69 C43.2
Net*1_23: *1.23 C38.2 | length 66.3
  Top Layer w6: *1.23 C38.2@1628.9,818.01
Net*1_24: *1.24 C39.1 X2.1 | length 320.3
  Top Layer w6: *1.24 1683.63,837.69 1694.6,826.73 1694.6,787 1714.06,767.54 X2.1 1790.6,739.23 C39.1
Net*1_25: *1.25 C40.1 X2.3 | length 394.4
  Top Layer w6: *1.25 1604.81,857.38 1612.49,849.69 1688.6,849.69 1706.6,831.7 1706.6,815 1719.6,802 1816.6,802 X2.3 1825.6,859 C40.1
Net*1_26: *1.26 C37.2 | length 57.3
  Top Layer w6: *1.26 C37.2@1619.85,877.06
Net*1_27: *1.27 R21.2 | length 72
  Top Layer w6: *1.27 1621.03,896.75 R21.2
Net*1_29: *1.29 C36.2 R14.2 R21.1 | length 147.4
  Top Layer w6: *1.29 1600.72,936.12 1610.6,946 R21.1 R14.2
Net*1_34: *1.34 R11.1 | length 66.2
  Top Layer w14: *1.34 1464.14,1057.48 cw(c1469.11,1057.48) R11.1
Net*1_35: *1.35 R13.1 | length 69.5
  Top Layer w13: R13.1 cw(c1397.14,1027.54) 1444.46,1027.54 *1.35
Net*1_40: *1.40 C31.1 R12.1 | length 177.1
  Top Layer w6: C31.1 1300.6,1076 1300.6,1024.96 1315.43,1010.13 1331.07,1010.13 *1.40
  Top Layer w10: C31.1@1325.6,1091 R12.1
NetAnt1_1: Ant1.1 C9.2 L2.1 | length 145.6
  Top Layer w14: C9.2 L2.1 1881.43,1825 Ant1.1
NetAnt2_1: Ant2.1 R10.1 | length 112.3
  Top Layer w14: R10.1@1761,1166 Ant2.1@1850.66,1166 ; Ant2.1@1854.66,1165 ccw(c1854.66,1193.77) Ant2.1
NetAV1_5: AV1.5 X3.1 | length 202.6
  Top Layer w10: AV1.5 1817.77,241.02 1822.44,245.69 1879.56,245.69 1918.46,206.78 X3.1
NetAV1_6: AV1.6 X3.3 | length 128.3
  Top Layer w10: AV1.6 1823.61,266.61 X3.3
NetAV1_8: AV1.8 mcu.15 | length 1648.2
  Top Layer w10: mcu.15@554.13,412.01 572.01,412.01 v2(620,460) ; AV1.8 v2(1787.8,317.8)
  Bottom Layer w10: v2(620,460) 545,385 545,300 626.39,218.61 1688.61,218.61 v2(1787.8,317.8)
NetAV1_11: AV1.11 mcu.13 R40.2 | length 1904.7
  Top Layer w10: mcu.13@554.13,372.64 587.36,372.64 v2(595,365) ; v2(1021,447.5) v2(1090,378.5) ; v2(1099.6,761) R40.2@1099.6,887.31 ; AV1.11 v2(1789.57,394.57)
  Bottom Layer w10: v2(595,365) 1031.75,364.99 1045.27,378.5 v2(1090,378.5) 1441.22,378.5 1474.24,345.48 1516.3,345.48 1537.71,366.89 1761.89,366.89 v2(1789.57,394.57) ; v2(1021,447.5) 1021,647 ; 1021,646 1021,682.4 v2(1099.6,761)
NetAV1_22: AV1.22 C3.1 | length 454.2
  Top Layer w10: v2(1320,470) 1298.46,470 C3.1 1328.46,510 1383.56,510 1394,499.56 1394,446 1404.79,435.21 1447,435.21 1460,422.21 1460,350.15 1471,339.15 1471,309 1487.8,292.2 AV1.22
  Bottom Layer w10: v2(1320,470) v2@1325,465
NetAV1_25: AV1.25 C2.1 | length 224.7
  Top Layer w10: C2.1 1455,332.52 1455,238.44 1478.01,215.43 AV1.25
NetAV1_26: AV1.26 C1.1 | length 161.2
  Top Layer w10: C1.1 1412.52,202.48 1425.16,189.84 AV1.26
NetC1_2: C1.2 C2.2 R1.1 | length 218.4
  Top Layer w10: R1.1 1239.02,216.54 C1.2 C2.2
NetC3_2: C3.2 IF*.6 R2.2 R39.1 | length 718.1
  Top Layer w10: IF*.6 1305,180 1361,236 R2.2 1326,440 1261,440 C3.2 1226,449.46 R39.1
NetC4_1: C4.1 R3.2 | length 40.3
  Top Layer w10: R3.2 C4.1
NetC7_1: C7.1 C27.1 L7.2 R10.2 | length 110.3
  Top Layer w14: C27.1 C7.1 R10.2
NetC7_2: C7.2 U1.3 | length 168.5
  Top Layer w14: 1621.78,1367 1621.78,1260.75 ccw(c1701.06,1260.75) C7.2
NetC8_1: C8.1 U1.13 | length 50.4
  Top Layer w13: U1.13 C8.1@1621.78,1600.78
NetC8_2: C8.2 U5.1 | length 45.1
  Top Layer w14: C8.2 U5.1
NetC9_1: C9.1 L1.2 | length 34.3
  Top Layer w14: L1.2 C9.1
NetC12_2: C12.2 R5.1 | length 39.7
  Top Layer w10: C12.2@1773,1352.31 R5.1
NetC13_1: C13.1 L3.2 | length 57.7
  Top Layer w10: C13.1 1788,1421.69 L3.2
NetC13_2: C13.2 U1.7 | length 51.8
  Top Layer w10: U1.7 1702.49,1449 1736.32,1449 C13.2
NetC14_1: C14.1 D1.2 DC1.8 L4.1 | length 557.6
  Top Layer w15: 308.86,1381.14 330,1402.28 v2(330,1445)
  Top Layer w25: DC1.8 308.86,1381.14 L4.1 405,1448.19 D1.2
  Bottom Layer w15: v2(330,1445) C14.1
NetC14_2: C14.2 DC1.1 | length 136.4
  Top Layer w15: DC1.1 291.14,1648.86 v2(330,1610)
  Bottom Layer w15: C14.2 v2(330,1610)
NetC15_2: C15.2 DC1.5 R6.2 R8.1 | length 175.6
  Top Layer w15: C15.2 R6.2 125,1259.69 DC1.5
NetC17_1: C17.1 DC1.6 R7.1 | length 174.8
  Top Layer w10: C17.1 165,1225 145,1245 145,1275 R7.1
  Top Layer w15: R7.1@175,1305 DC1.6
NetC18_1: C18.1 DC1.4 | length 110.3
  Top Layer w15: C18.1 125,1745 DC1.4
NetC19_1: C19.1 R7.2 | length 54.7
  Top Layer w15: R7.2 C19.1@224.68,1260.32
NetC21_1: C21.1 U2.4 | length 53.4
  Top Layer w10: C21.1 1066.6,1100 U2.4
NetC23_1: C23.1 U3.4 | length 39.8
  Top Layer w10: C23.1 U3.4@669.82,380
NetC25_1: C25.1 U4.4 | length 45.7
  Top Layer w10: C25.1 913.49,398.49 U4.4
NetC26_1: C26.1 L6.2 | length 35.3
  Top Layer w10: C26.1 L6.2
NetC26_2: C26.2 L5.1 R11.2 R13.2 | length 134.7
  Top Layer w14: L5.1 C26.2 1430.6,1164.72 R13.2 R11.2
NetC27_2: C27.2 L6.1 | length 30.3
  Top Layer w10: L6.1 C27.2
NetC29_2: C29.2 L5.2 R9.1 | length 90.4
  Top Layer w10: C29.2@1261,1165.69 1351,1165.69 L5.2@1351.31,1166
NetC35_2: C35.2 R14.1 | length 39.7
  Top Layer w6: C35.2@1745.6,906.32 R14.1
NetC43_1: C43.1 R28.2 | length 64.8
  Top Layer w6: C43.1 1710.6,696 R28.2
NetC44_1: C44.1 C47.1 R31.1 R35.2 | length 119.7
  Top Layer w6: R31.1@1200.6,561 C47.1 R35.2@1245.28,596 ; C47.1@1205.6,601 C44.1
NetC44_2: C44.2 R24.1 | length 39.7
  Top Layer w6: C44.2 R24.1@1165.91,680.69
NetC45_2: C45.2 R27.1 | length 59.6
  Top Layer w6: R27.1 1295.6,676.31 C45.2
NetC46_2: C46.2 R25.1 R26.1 R30.2 | length 195.3
  Top Layer w6: R26.1 1550.6,651 R25.1 ; R30.2 R25.1 ; C46.2 1610.28,686 R25.1
NetC47_2: C47.2 R1.2 R31.2 R34.2 R39.2 | length 389.9
  Top Layer w6: R34.2 1116.23,595.69 R31.2 1161.5,550.41 1161.5,384.5 R39.2 ; R31.2@1160.91,561 C47.2
  Top Layer w10: R1.2 R39.2
NetC48_1: C48.1 R32.2 R33.1 | length 98.4
  Top Layer w6: R33.1@1825.05,601.55 C48.1 1848.43,621 R32.2
NetC48_2: C48.2 R28.1 R33.2 R36.2 | length 158.1
  Top Layer w6: R36.2@1710.6,600.69 R28.1 ; R36.2 R33.2@1790.6,595.69 ; R33.2 C48.2@1790.91,638.83
NetC50_1: C50.1 R29.2 | length 40.3
  Top Layer w6: C50.1 R29.2
NetC51_2: C51.2 R30.1 | length 56.5
  Top Layer w6: C51.2 1570.6,561 R30.1
NetC52_2: C52.2 mcu.2 X1.1 | length 245.6
  Top Layer w6: X1.1 351.69,102.19 388.69,139.19 388.69,280.99 mcu.2@386.61,283.07
  Top Layer w10: C52.2 X1.1@337.91,115.32
NetC53_2: C53.2 mcu.3 X1.3 | length 170.4
  Top Layer w6: mcu.3@406.3,283.07 405,281.77 405,203 X1.3
  Top Layer w10: X1.3@458.31,149.69 C53.2
Netdebug_1: debug.1 mcu.28 | length 186.8
  Top Layer w10: debug.1 253.43,471.06 mcu.28@336.42,471.06
Netdebug_2: debug.2 mcu.30 | length 152.5
  Top Layer w10: debug.2@218.43,348.43 301.69,431.69 mcu.30@336.42,431.69
Netdebug_3: debug.3 mcu.25 | length 638.1
  Top Layer w10: debug.3 125.79,299.21 105,320 105,410 275,580 410,580 421,569 421,540.55 406.3,525.85 mcu.25@406.3,501.57
NetIF*_3: IF*.3 mcu.9 | length 595.1
  Top Layer w10: mcu.9@526.93,283.07 v2(615,195) ; v2(985,115) 985,174.21 IF*.3
  Bottom Layer w10: v2(615,195) 905,195 v2(985,115)
NetIF*_4: IF*.4 mcu.10 | length 602.3
  Top Layer w10: mcu.10@554.13,313.58 602.72,265 v2(635,265) ; IF*.4 v2(1040,255)
  Bottom Layer w10: v2(635,265) 876.49,265 882.63,271.14 902.1,271.14 915.86,257.37 915.86,255.9 930.27,241.5 949.73,241.5 963.23,255 v2(1040,255)
NetIF*_5: IF*.5 R32.1 | length 1537.3
  Top Layer w14: IF*.5 1090,179.21 v2(1090,75) ; R32.1 1945,586.6 v2(1945,541)
  Bottom Layer w14: v2(1090,75) 1130,35 1877,35 1945,103 v2(1945,541)
NetL1_1: L1.1 U5.2 | length 43.8
  Top Layer w14: U5.2 L1.1
Netmcu_4: mcu.4 R38.1 | length 47.1
  Top Layer w10: R38.1@425.98,235.98 mcu.4@425.98,283.07
Netmcu_21: mcu.21
Netmcu_22: mcu.22
Netmcu_35: mcu.35 R37.1 | length 51.3
  Top Layer w10: R37.1 301.73,333.27 mcu.35@336.42,333.27
NetR4_2: R4.2 U1.10 | length 59.5
  Top Layer w10: U1.10 1735.4,1542 R4.2
NetR5_2: R5.2 U1.6 | length 51.1
  Top Layer w10: U1.6 1702.49,1422.83 R5.2
VCC: C57.1 DC1.2 DC1.3 | length 178.7
  Top Layer w25: C57.1@175,1777.52 DC1.3 DC1.2
VREF: C12.1 L3.1 U1.5 | length 191.2
  Top Layer w10: U1.5 1695.99,1389.01 C12.1 1756,1329 1787.24,1329 1810.24,1352 L3.1
pads on no net: *1.2 *1.12 *1.13 *1.14 *1.15 *1.16 *1.18 *1.36 *1.37 AV1.0 AV1.1 AV1.2 AV1.7 AV1.12 AV1.13 AV1.14 AV1.15 AV1.16 AV1.17 AV1.18 AV1.27 AV1.28 debug.5 debug.shell IF*.shell mcu.7 mcu.8 mcu.11 mcu.17 mcu.29 mcu.31 mcu.32 mcu.33 mcu.34

## Polygon pours and split planes (outlines as drawn)
GND on Top Layer "Top Layer-No Net" (solid, remove dead copper, pour order 7): 970,1180 1970,1180 1970,501.5 1968.5,500 1958.5,510 1100,510 1100,520 970,650
GND on Top Layer "PA" (solid, remove dead copper, pour order 5): 1305,1204.69 1305,1963.5 1300,1968.5 1968.5,1968.5 1968.5,1211.5 1970,1210
GND on Top Layer "Top Layer-No Net" (solid, remove dead copper, pour order 2): 0,1150 700,1150 700,1970 655,2015 -50,2015
GND on GND (split plane): 1101.4,501.4 1103.05,500.29 1105,499.9 1948.41,499.9 1948.41,20.1 845.1,20.1 845.1,542.89 937.11,634.9 967.89,634.9
GND on GND (split plane): 1948.41,510.1 1107.11,510.1 975.1,642.11 975.1,1187.89 1077.11,1289.9 1299.9,1289.9 1299.9,1210 1300.29,1208.05 1301.4,1206.4 1303.05,1205.29 1305,1204.9 1823,1204.9 1824.95,1205.29 1826.6,1206.4 1827.71,1208.05 1828.1,1210 1827.71,1211.95 1826.6,1213.6 1824.95,1214.71 1823,1215.1 1310.1,1215.1 1310.1,1948.41 1948.41,1948.41
GND on GND (split plane): 834.9,542.89 834.9,20.1 20.1,20.1 20.1,654.9 722.89,654.9
GND on GND (split plane): 699.9,1155.1 20.1,1155.1 20.1,1948.41 699.9,1948.41
GND on GND (split plane): 1299.9,1300.1 1075,1300.1 1073.05,1299.71 1071.4,1298.6 966.4,1193.6 965.29,1191.95 964.9,1190 964.9,645.1 935,645.1 933.05,644.71 931.4,643.6 840,552.21 728.6,663.6 726.95,664.71 725,665.1 20.1,665.1 20.1,1144.9 705,1144.9 706.95,1145.29 708.6,1146.4 709.71,1148.05 710.1,1150 710.1,1948.41 1299.9,1948.41
3.3A on Power (split plane): 1299.9,1240 1300.29,1238.05 1301.4,1236.4 1303.05,1235.29 1305,1234.9 1948.41,1234.9 1948.41,510.1 1107.11,510.1 973.6,643.6 971.95,644.71 971.1,644.88 971.1,668.89 973.6,671.4 974.71,673.05 975.1,675 975.1,1187.89 1077.11,1289.9 1299.9,1289.9
5V on Power (split plane): 1948.41,1245.1 1310.1,1245.1 1310.1,1948.41 1948.41,1948.41
5V on Power (split plane): 960.9,641 961.29,639.05 962.4,637.4 964.05,636.29 966,635.9 966.74,636.05 1101.4,501.4 1103.05,500.29 1105,499.9 1948.41,499.9 1948.41,20.1 845.1,20.1 845.1,542.89 960.9,658.69
GND on Power (split plane): 1299.9,1300.1 1075,1300.1 1073.05,1299.71 1071.4,1298.6 966.4,1193.6 965.29,1191.95 964.9,1190 964.9,680.88 964.05,680.71 962.4,679.6 961.29,677.95 960.9,676 960.9,673.11 840,552.21 728.6,663.6 726.95,664.71 725,665.1 20.1,665.1 20.1,1144.9 705,1144.9 706.95,1145.29 708.6,1146.4 709.71,1148.05 710.1,1150 710.1,1948.41 1299.9,1948.41
GND on Power (split plane): 699.9,1155.1 20.1,1155.1 20.1,1948.41 699.9,1948.41
3.3D on Power (split plane): 834.9,542.89 834.9,20.1 20.1,20.1 20.1,654.9 722.89,654.9

## Keep-outs
Keep-Out Layer:
  the board outline again, w10

## Other copper
Power (plane layer: these items are gaps in the copper):
  lines w10: 0,660 725,660 840,545 ; 0,1150 705,1150 705,1968.5 ; 840,0 840,545 ; 966,641 966,676 ; 970,640 1105,505 1968.5,505 ; 1305,1295 1075,1295 970,1190 970,675 840,545 ; 1305,1968.5 1305,1240 1968.5,1240
GND (plane layer: these items are gaps in the copper):
  lines w10: 0,660 725,660 840,545 ; 0,1150 705,1150 705,1968.5 ; 840,0 840,545 ; 1305,1295 1075,1295 970,1190 970,640 ; 1305,1955 1305,1210 1823,1210 ; 1968.5,505 1105,505 970,640 ; 840,545 935,640 970,640